# EAGLE board top-plate (EAGLE 9.6.2)

Size 136.49 x 93.56 mm. Coordinates in mm from the lower left corner, seen from the top.
Outline: 69.5,31.06 83.5,31.06 83.5,17.06 69.5,17.06 69.5,31.06
Outline: 93.55,29.63 107.07,26.01 103.45,12.48 89.93,16.11 93.55,29.63
Outline: 118.69,25.87 130.81,18.87 123.81,6.74 111.69,13.74 118.69,25.87
Outline: 37,87.56 1.5,87.56 arc90 0,86.06 0,32.06 arc90 1.5,30.56 50.84,30.56 66.59,14.8 arc37 67.45,14.38 105.78,8.99 arc-22 106.32,8.8 121.22,0.2 arc90 123.27,0.75 136.29,23.33 arc30 136.49,24.07 136.49,52.06 arc90 134.99,53.56 115.5,53.56 arc-90 114,55.06 114,88.06 arc90 112.5,89.56 96,89.56 arc-90 95,90.56 arc90 94,91.56 77,91.56 arc-90 76,92.56 arc90 75,93.56 58,93.56 arc90 57,92.56 arc-90 56,91.56 39,91.56 arc90 38,90.56 38,88.56 arc-90 37,87.56
Outline: 117.5,51.06 131.5,51.06 131.5,37.06 117.5,37.06 117.5,51.06
Outline: 2.5,47.06 16.5,47.06 16.5,33.06 2.5,33.06 2.5,47.06
Outline: 21.5,47.06 35.5,47.06 35.5,33.06 21.5,33.06 21.5,47.06
Outline: 2.5,66.06 16.5,66.06 16.5,52.06 2.5,52.06 2.5,66.06
Outline: 21.5,66.06 35.5,66.06 35.5,52.06 21.5,52.06 21.5,66.06
Outline: 40.5,51.06 54.5,51.06 54.5,37.06 40.5,37.06 40.5,51.06
Outline: 40.5,70.06 54.5,70.06 54.5,56.06 40.5,56.06 40.5,70.06
Outline: 40.5,89.06 54.5,89.06 54.5,75.06 40.5,75.06 40.5,89.06
Outline: 59.5,91.06 73.5,91.06 73.5,77.06 59.5,77.06 59.5,91.06
Outline: 78.5,89.06 92.5,89.06 92.5,75.06 78.5,75.06 78.5,89.06
Outline: 78.5,70.06 92.5,70.06 92.5,56.06 78.5,56.06 78.5,70.06
Outline: 59.5,53.06 73.5,53.06 73.5,39.06 59.5,39.06 59.5,53.06
Outline: 78.5,51.06 92.5,51.06 92.5,37.06 78.5,37.06 78.5,51.06
Outline: 97.5,49.06 111.5,49.06 111.5,35.06 97.5,35.06 97.5,49.06
Outline: 97.5,68.06 111.5,68.06 111.5,54.06 97.5,54.06 97.5,68.06
Outline: 97.5,87.06 111.5,87.06 111.5,73.06 97.5,73.06 97.5,87.06
Outline: 2.5,85.06 16.5,85.06 16.5,71.06 2.5,71.06 2.5,85.06
Outline: 21.5,85.06 35.5,85.06 35.5,71.06 21.5,71.06 21.5,85.06
Outline: 59.5,58.06 59.5,72.06 73.5,72.06 73.5,58.06 59.5,58.06
Copper layers (1*16): Top 0.035mm / dielectric 1.5mm / Bottom 0.035mm
Design rules "default": minimum track width 6mil, minimum drill 0.35mm, track to track 6mil, track to pad 6mil, pad to pad 6mil, via to via 6mil, smd to smd 6mil, copper to edge 40mil, drill to drill 6mil, minimum pad ring 10mil, minimum via ring 8mil, stop-mask expansion 4mil, vias tented up to drill 0mil, thermal gap 10mil

## Footprints (pad centres in the part's own frame; a part is rotated, then mirrored left to right if it is on the bottom)
HOLE-M2 = drill 2.6: P$1 0,0

## Placement (x,y rotation side)
E$1  [HOLE-M2]  19,68.56 0 top
E$2  [HOLE-M2]  19,49.56 0 top
E$3  [HOLE-M2]  61,30.56 0 top
E$4  [HOLE-M2]  76,73.56 0 top
E$5  [HOLE-M2]  116,31.56 0 top

## Library data of the parts
E$1-E$5 = platedhole